# Altium PCB MasterDMX.PcbDoc
Units mm, origin at the board's own origin, x right, y up, seen from the top; angles counter-clockwise.
Board outline 50.04 x 60.07 mm, 2 copper layers (Top Layer, Bottom Layer); 44 components, 34 nets, 198 pads, 26 vias.
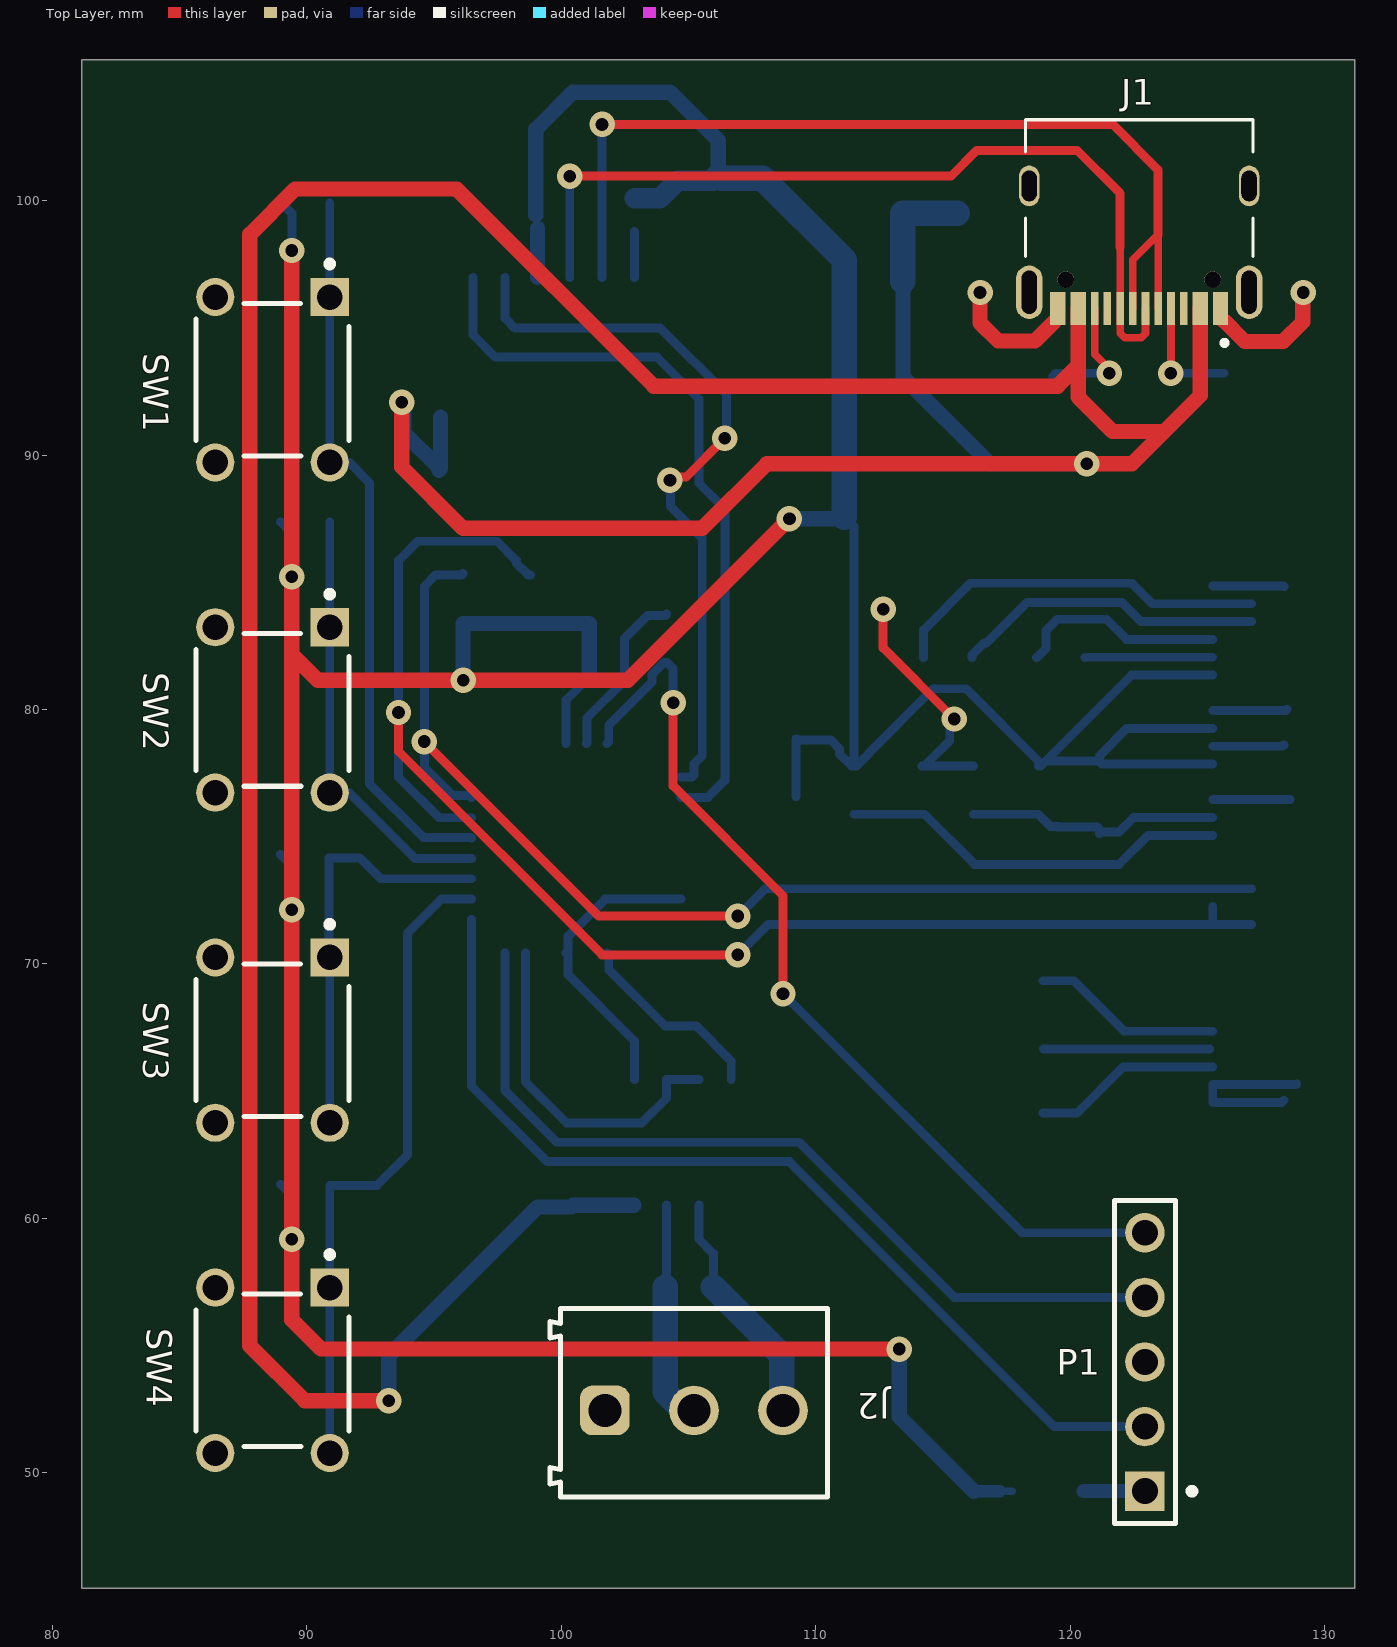
[diagram p0: Top Layer view]
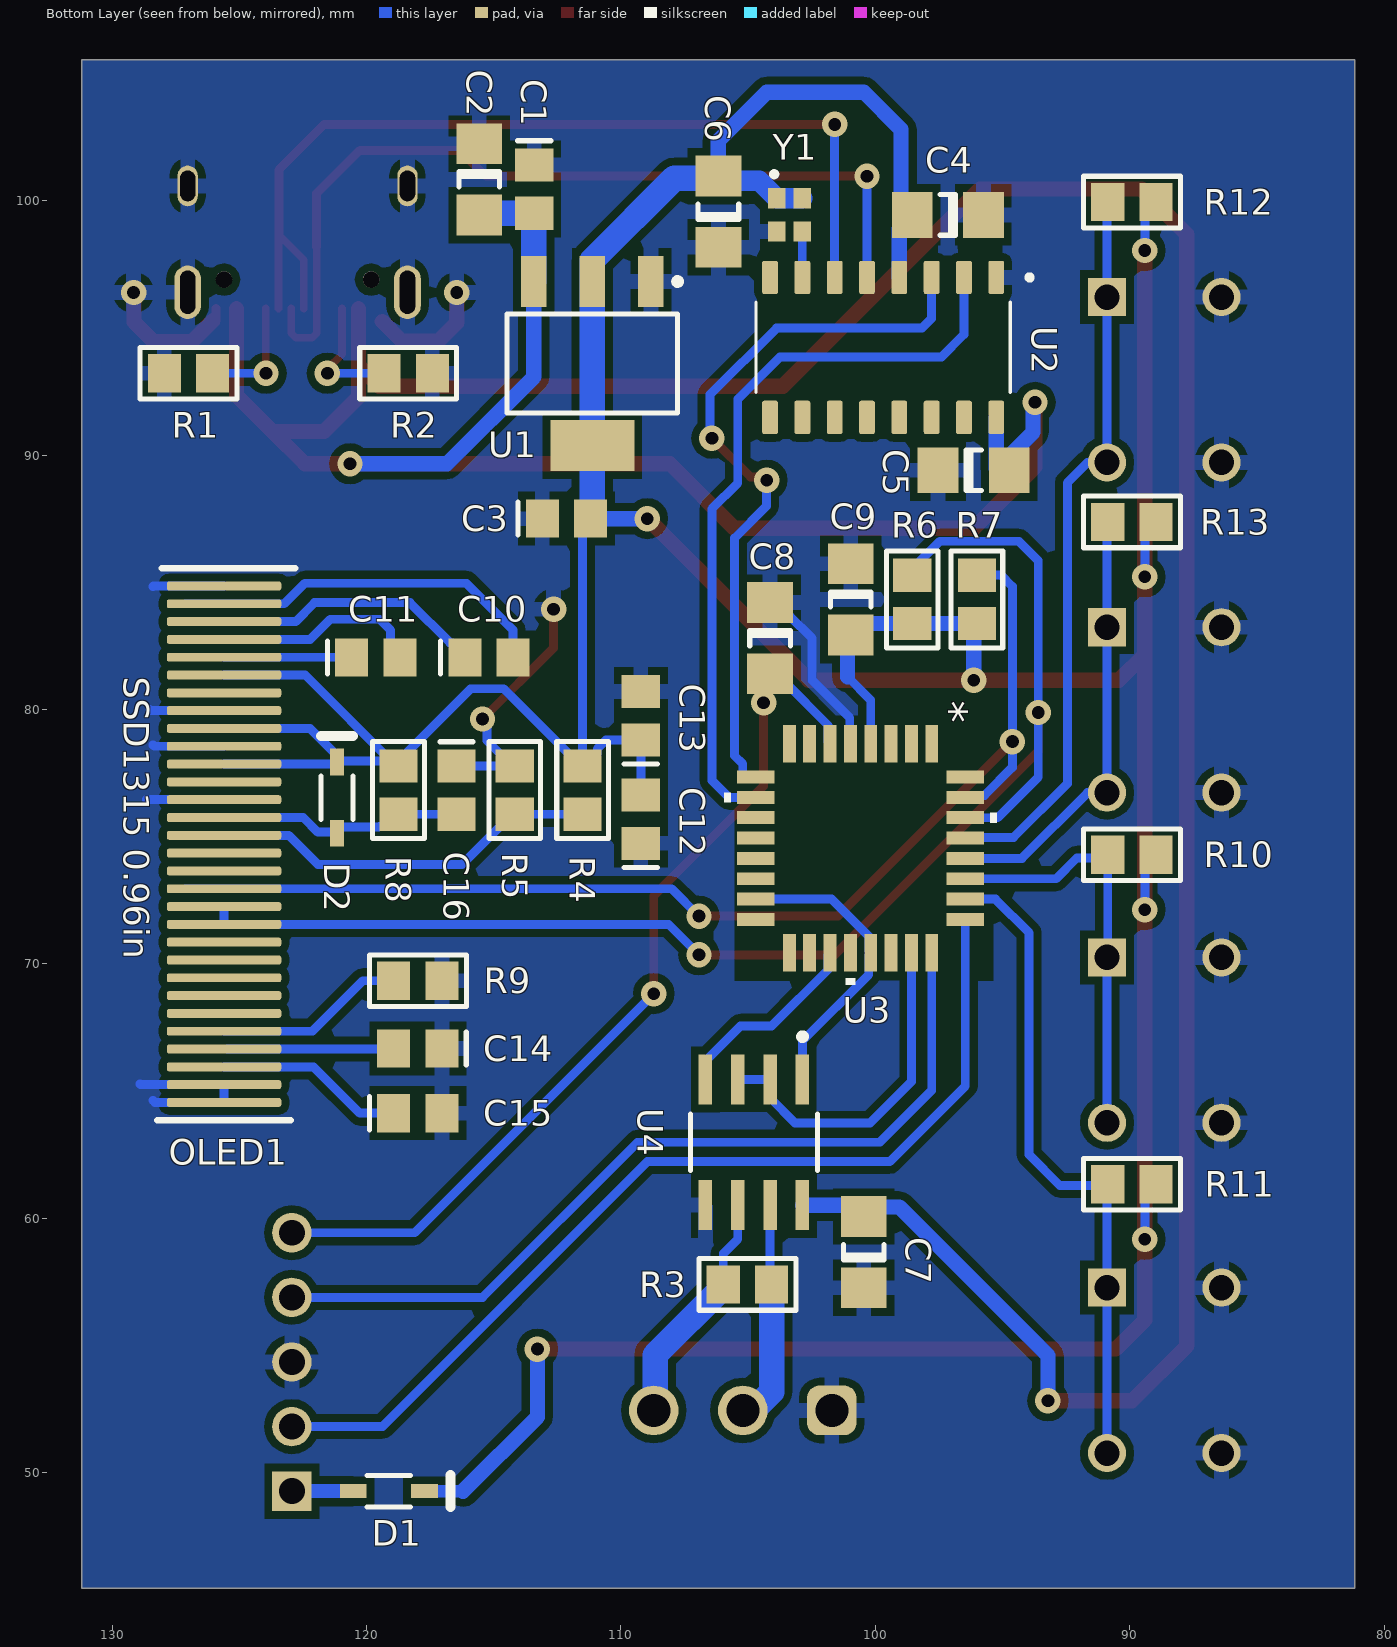
[diagram p1: Bottom Layer view, seen from below]
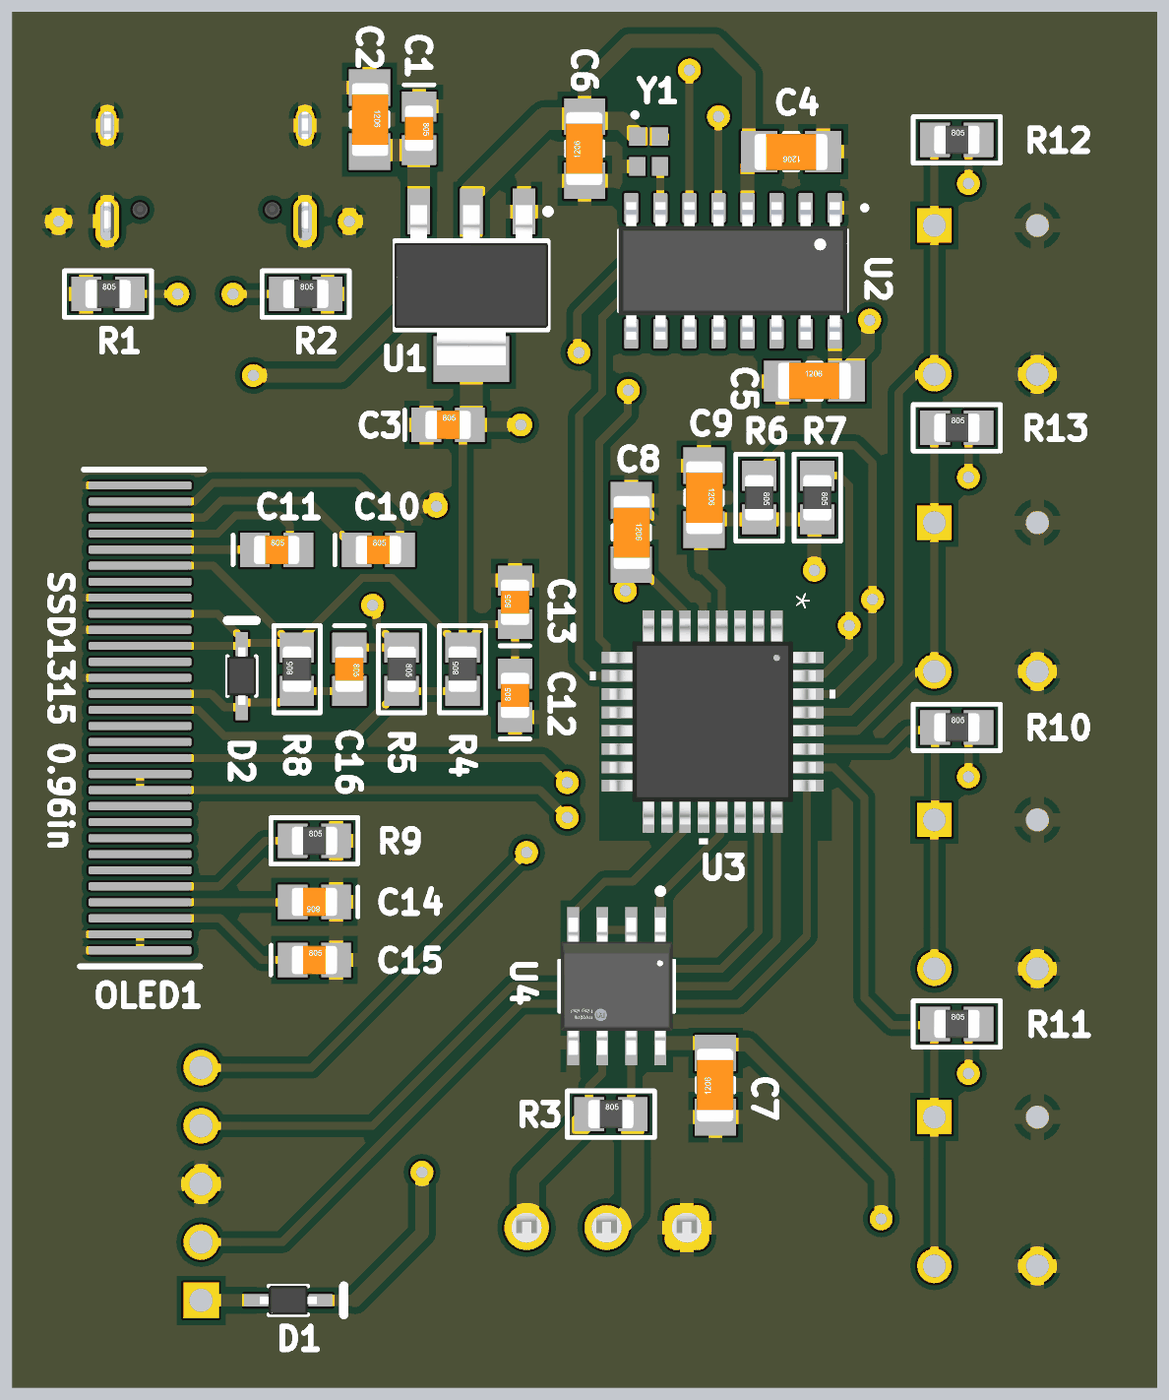
[diagram p2: 3D render of the assembled board from below, using the file's embedded part models]

## Layer stack, top to bottom
Top Solder: solder mask 0.0102, Solder Resist, Dk 3.5
Top Layer: signal copper 0.0356
Dielectric 1: dielectric 0.32, FR-4, Dk 4.8
Bottom Layer: signal copper 0.0356
Bottom Solder: solder mask 0.0102, Solder Resist, Dk 3.5

## Board outline
81.153,45.466 81.153,105.537 131.191,105.537 131.191,45.466

## Design rules (kind name [scope] priority, off if disabled: settings)
Clearance Clearance_U3 [InComponent('U3')] p1: gap=0.1 ignorepadtopadclearanceinfootprint=FALSE
Clearance Clearance_Exclusion [InComponent('J1') OR InComponent('U3') or InNet('5V0') or InNet('D+') or InNet('D-') or InNet('NetJ1_A5') or InNet('NetJ1_B5') vs OnLayer('Top Layer')] p2: gap=0.1 ignorepadtopadclearanceinfootprint=FALSE
Clearance [All] p3: gap=0.3 ignorepadtopadclearanceinfootprint=FALSE
ComponentClearance [All] p1: gap=0.256 collisioncheckmode=3 verticalgap=0.256 showdistances=FALSE donotcheckwithout3dbody=TRUE
HoleSize [All] p1: absolutevalues=TRUE maxlimit=2 minlimit=0.3 maxpercent=80.000 minpercent=20.000
MinimumSolderMaskSliver [All] p1: minsoldermaskwidth=0.09
PolygonConnect [All] p1: connectstyle=Relief reliefconductorwidth=0.6 reliefentries=4 polygonreliefangle="90 Angle" airgapwidth=0.3
RoutingVias [All] p1: holewidth=0.711 width=1.27 viastyle="Through Hole" minholewidth=0.711 minwidth=1.27 maxholewidth=0.711 maxwidth=1.27
SilkToSolderMaskClearance [IsPad] p1: minsilkscreentomaskgap=0.094 clearancetoexposedcopper=TRUE
SolderMaskExpansion [All] p1: expansion=0.102 istentingtop=FALSE
SupplyNets "Schematic Supply Nets" [InNet('GND')] p1: voltage=0.000
Width [All] p1: maxlimit=1 minlimit=0.1 preferedwidth=0.35
26 further rules are at their usual default settings.

## Classes and differential pairs
component class MasterDMX: C1 C2 C3 C4 C5 C6 C7 C8 C9 D1 J1 J2 P1 R1 R2 R3 U1 U2 U3 U4 Y1
component class Designator: 1 C10 C11 C12 C13 C14 C15 C16 D2 OLED1 R4 R5 R6 R7 R8 R9 R10 R11 R12 R13 SW1 SW2 SW3 SW4

## Components (designator, comment, footprint, x,y, rotation, side; value= is the part's Value field where it differs from the comment)
C1 "3.3u" C2012[0805] 113.411,100.457 r270 bottom value=1
C2 "100n" C3216[1206] 115.57,100.838 r270 bottom value=1
C3 "3.3u" C2012[0805] 112.141,87.503 r180 bottom value=1
C4 "100n" C3216[1206] 97.155,99.441 r0 bottom value=1
C5 "100n" C3216[1206] 96.139,89.408 r180 bottom value=1
C6 "100n" C3216[1206] 106.172,99.568 r90 bottom value=1
C7 "100n" C3216[1206] 100.457,58.674 r90 bottom value=1
C8 "100n" C3216[1206] 104.14,82.804 r270 bottom value=1
C9 "100n" C3216[1206] 100.965,84.328 r270 bottom value=1
C10 "1u" C2012[0805] 115.189,82.042 r180 bottom value=1
C11 "1u" C2012[0805] 119.634,82.042 r180 bottom value=1
C12 "1u" C2012[0805] 109.22,75.692 r90 bottom value=1
C13 "1u" C2012[0805] 109.22,79.756 r90 bottom value=1
C14 "2.2u" C2012[0805] 117.983,66.675 r0 bottom value=1
C15 "2.2u" C2012[0805] 117.983,64.135 r180 bottom value=1
C16 "10u" C2012[0805] 116.459,76.835 r270 bottom value=1
D1 "1N4148WS" FAIR-SOD-323_V 119.126,49.276 r180 bottom
D2 "1N4148WS" FAIR-SOD-323_V 121.158,76.536 r90 bottom
J1 "CQ-USB-C16PSMT01" SHENZHEN-CHUANGQIN-TECHNOLOGY_CQ-USB-C16PSMT01 122.713,95.761 r180 top
J2 "DMX_Connector" 691214110003 105.212,52.751 r0 top
OLED1 "X0096-2864KS WPG02-H30" SSD1315_0.96in_30P 125.603,84.857 r270 bottom
P1 "Programming Interface" FCI-77311-5_V 122.936,54.356 r90 top
R1 "5.6k" R2012[0805] 127,93.218 r180 bottom value=0
R2 "5.6k" R2012[0805] 118.364,93.218 r180 bottom value=0
R3 "120" R2012[0805] 105.029,57.404 r180 bottom value=0
R4 "0" R2012[0805] 111.506,76.835 r90 bottom
R5 "0" R2012[0805] 114.173,76.835 r270 bottom
R6 "4.7k" R2012[0805] 98.552,84.328 r270 bottom value=0
R7 "4.7k" R2012[0805] 96.012,84.328 r270 bottom value=0
R8 "4.7k" R2012[0805] 118.745,76.835 r90 bottom value=0
R9 "240k" R2012[0805] 117.983,69.342 r180 bottom value=0
R10 "12k" R2012[0805] 89.916,74.295 r180 bottom value=0
R11 "12k" R2012[0805] 89.916,61.341 r180 bottom value=0
R12 "12k" R2012[0805] 89.916,99.949 r180 bottom value=0
R13 "12k" R2012[0805] 89.916,87.376 r180 bottom value=0
SW1 "B3F-1000" OMRON-B3F-1000-4_V 88.646,92.964 r270 top
SW2 "B3F-1000" OMRON-B3F-1000-4_V 88.646,79.985 r270 top
SW3 "B3F-1000" OMRON-B3F-1000-4_V 88.646,67.006 r270 top
SW4 "B3F-1000" OMRON-B3F-1000-4_V 88.646,54.027 r270 top
U1 "LD1117S33TR" STM-SOT-223_M 111.125,93.599 r270 bottom
U2 "CH340G" SOIC127P600X180-16N 99.695,94.234 r270 bottom
U3 "STM32C031K6T6" LQFP32_7X7_STM 100.584,74.549 r270 bottom
U4 "MAX485ESA+T" FP-S8-2-MFG 104.775,62.992 r270 bottom
Y1 "YSO110TR" OSC_ECS-TXO-2016-33-120-TR 103.378,99.441 r270 bottom

## Footprints (in the part's own frame and the unit in brackets; to place one, negate y for a bottom-side part, rotate by r counter-clockwise, add the part's x,y. Pads: shape width x height; smd on the part's side, far side on the other; paste and mask are expansions set on the pad)
691214110003 [mm] "3.50 mm Horizontal Entry Modular, 3p"
  rrect50% 1.95x1.95 hole 1.3: 1(-3.5,-0.3)
  round 1.95 hole 1.3: 2(0,-0.3) 3(3.5,-0.3)
  silkscreen extent -5.65,-3.7 5.25,3.7, body extent -5.7,-3.7 5.25,3.7, height 8.55
C2012[0805] [mm] "Chip Capacitor; Body 2.0 x 1.2 mm (LxW typ)"
  rect 1.3x1.5 smd: 1(-0.95,0) 2(0.95,0)
  silkscreen extent -1.9,-0.65 -1.9,0.65, body extent -1,-0.62 1,0.63, height 0.8
C3216[1206] [mm] "Chip Capacitor; Body 3.2 x 1.6 mm (LxW typ)"
  rect 1.6x1.8 smd: 1(-1.4,0) 2(1.4,0)
  silkscreen extent -0.3,-0.8 0.3,0.8, body extent -1.6,-0.78 1.6,0.82, height 1.02
FAIR-SOD-323_V [mm] "SODFL, 2-Leads, Body 1.25x1.7mm"
  rect 1.05x0.55 smd: 1(-1.4,0) 2(1.4,0)
  silkscreen extent -0.85,-0.63 2.43,0.63, body extent -1.25,-0.63 1.25,0.63, height 1
FCI-77311-5_V [mm] "THD, 5-Leads, Body 12.7x2.4mm, Pitch 2.54mm"
  rect 1.55x1.55 hole 1.02: 1(-5.08,0)
  round 1.55 hole 1.02: 2(-2.54,0) 3(0,0) 4(2.54,0) 5(5.08,0)
  silkscreen extent -6.35,-1.97 6.35,1.2, body extent -6.35,-1.2 6.35,1.2, height 16.24
FP-S8-2-MFG [mm]
  rect 1.98x0.53 smd paste+0 mask+0: 1(-2.465,1.905) 2(-2.465,0.635) 3(-2.465,-0.635) 4(-2.465,-1.905) 5(2.465,-1.905) 6(2.465,-0.635) 7(2.465,0.635) 8(2.465,1.905)
  silkscreen extent -4.27,-2.5 1.1,2.5, body extent -3,-2.45 3,2.45, height 1.75
LQFP32_7X7_STM [mil]
  rect 58x20 smd paste+0 mask+0: 1(-162,110.24) 2(-162,78.74) 3(-162,47.24) 4(-162,15.75) 5(-162,-15.75) 6(-162,-47.24) 7(-162,-78.74) 8(-162,-110.24) 17(162,-110.24) 18(162,-78.74) 19(162,-47.24) 20(162,-15.75) 21(162,15.75) 22(162,47.24) 23(162,78.74) 24(162,110.24)
  rect 20x58 smd paste+0 mask+0: 9(-110.24,-162) 10(-78.74,-162) 11(-47.24,-162) 12(-15.75,-162) 13(15.75,-162) 14(47.24,-162) 15(78.74,-162) 16(110.24,-162) 25(110.24,162) 26(78.74,162) 27(47.24,162) 28(15.75,162) 29(-15.75,162) 30(-47.24,162) 31(-78.74,162) 32(-110.24,162)
  silkscreen extent -86,-211 211,211, body extent -177,-177 177,177, height 63
OMRON-B3F-1000-4_V [mm] "TH, 4-Leads, Body 6x6mm"
  rect 1.5x1.5 hole 1 paste-2539.97: 1(-3.25,2.25)
  round 1.5 hole 1 paste-2539.97: 2(3.25,2.25) 4(3.25,-2.25)
  round 1.5 hole 1 paste-2539.97 mask+0.102: 3(-3.25,-2.25)
  silkscreen extent -4.67,-3 3,3, body extent -3.4,-3 3.4,3, height 4.5
OSC_ECS-TXO-2016-33-120-TR [mm]
  rect 0.8x0.7 smd: 1(-0.65,-0.5) 2(0.65,-0.5) 3(0.65,0.5) 4(-0.65,0.5)
  silkscreen extent -1.7,-0.7 -1.5,-0.5
R2012[0805] [mm] "Chip Resistor; Body 2.0 x 1.3 mm (LxW typ)"
  rect 1.3x1.5 smd: 1(-0.95,0) 2(0.95,0)
  silkscreen extent -1.91,-1.02 1.91,1.02, body extent -1,-0.62 1,0.63, height 0.8
SHENZHEN-CHUANGQIN-TECHNOLOGY_CQ-USB-C16PSMT01 [mm]
  rect 0.6x1.3 smd: A1_B12(-3.2,0) A4_B9(-2.4,0) B1_A12(3.2,0) B4_A9(2.4,0)
  rect 0.3x1.3 smd: A5(-1.25,0) A6(-0.25,0) A7(0.25,0) A8(1.25,0) B5(1.75,0) B6(0.75,0) B7(-0.75,0) B8(-1.75,0)
  oval 1.05x2.1 hole 0.6 slot 1.7 at 90 deg: S1(-4.32,-0.64) S2(4.32,-0.64)
  oval 0.8x1.6 hole 0.6 slot 1.2 at 90 deg: S3(-4.32,-4.82) S4(4.32,-4.82)
  round 0.65 hole 0.65 unplated: ""(-2.89,-1.14) ""(2.89,-1.14)
  silkscreen extent -4.47,-7.42 4.47,1.45, body extent -4.47,-7.46 4.47,0.35, height 3.26
SOIC127P600X180-16N [mm]
  rrect25% 1.31x0.62 smd: 1(-2.75,4.445) 2(-2.75,3.175) 3(-2.75,1.905) 4(-2.75,0.635) 5(-2.75,-0.635) 6(-2.75,-1.905) 7(-2.75,-3.175) 8(-2.75,-4.445) 9(2.75,-4.445) 10(2.75,-3.175) 11(2.75,-1.905) 12(2.75,-0.635) 13(2.75,0.635) 14(2.75,1.905) 15(2.75,3.175) 16(2.75,4.445)
  silkscreen extent -2.85,-5 1.78,5.85, body extent -3,-5 3,5, height 1.8
SSD1315_0.96in_30P [mm]
  rrect50% 0.35x4.5 smd: 1(0,0) 2(0.7,0) 3(1.4,0) 4(2.1,0) 5(2.8,0) 6(3.5,0) 7(4.2,0) 8(4.9,0) 9(5.6,0) 10(6.3,0) 11(7,0) 12(7.7,0) 13(8.4,0) 14(9.1,0) 15(9.8,0) 16(10.5,0) 17(11.2,0) 18(11.9,0) 19(12.6,0) 20(13.3,0) 21(14,0) 22(14.7,0) 23(15.4,0) 24(16.1,0) 25(16.8,0) 26(17.5,0) 27(18.2,0) 28(18.9,0) 29(19.6,0) 30(20.3,0)
  silkscreen extent -0.7,-2.63 21,2.8
STM-SOT-223_M [mm] "SOT223, 4-Leads, Body 6.7x3.7mm, Pitch 2.3mm, IPC Low Density"
  rect 2x1 smd: 1(-3.225,2.3) 2(-3.225,0) 3(-3.225,-2.3)
  rect 2x3.3 smd: 4(3.225,0)
  silkscreen extent -3.35,-3.35 1.95,3.47, body extent -3.5,-3.35 3.5,3.35, height 1.8

## Part data
C1 C2 C3 C4 C5 C6 C7 C8 C9 C10 C11 C12 C13 C14 C15 C16: library part C, "Capacitor"
D1 D2: library part CMP-004-00001-2, "Small Signal Diode, 75 V, 0.15 A, -55 to 150 degC, 2-Pin SOD-323, RoHS, Tape and Reel", Capacitance=-323f, Case/Package=SOD-323, Forward Current=150mA, Forward Voltage=1V, Manufacturer=Fairchild, Max Operating Temperature=150°C, Min Operating Temperature=-55°C, Package Description="2-Pin Small Outline Diode Flat Lead, Body 1.7 x 1.25 mm", Package Quantity=3000, Peak Reverse Current=5uA, Datasheet URL=https://www.fairchildsemi.com/datasheets/1N/1N4148WS.pdf, Datasheet Version="Rev. 1.2, 03/2015", Manufacturer URL=https://www.fairchildsemi.com/, Mounting Technology=SM, Package Reference=SOD-323, Packaging=TapeandReel, Pins=2, Recovery Time=4ns, RoHS Compliant=True
J1: "C Type USB Type-C Female Plug 16 Pin Connector Power Charger Jack Port", Package=Package, Availability=Unavailable, Check_prices=https://www.snapeda.com/parts/CQ-USB-C16PSMT01/Shenzen%20Chuangqin%20Technology/view-part/5798994/?ref=eda, MF="Shenzen Chuangqin Technology", MP=CQ-USB-C16PSMT01, Price=None, SnapEDA_Link=https://www.snapeda.com/parts/CQ-USB-C16PSMT01/Shenzen%20Chuangqin%20Technology/view-part/5798994/?ref=snap
J2: library part CMP-1502-02466-2, Color="Blue, Green", Current=10A, Max Operating Temperature=105°C, Min Operating Temperature=-40°C, Voltage=300V, Contact Material=Brass, Contact Plating="Brass, Tin", Current Rating=10A, Height=12.2mm, Housing Material=Nylon, Lead Pitch=3.5mm, Length=7.4mm, Mount="Through Hole", NexarPartId=18818289, Number of Contacts=3, Number of Levels=1, Number of Pins=3, Number of Positions Per Level=3, Packaging=Box, Pitch=3.5052mm, Plating="Brass, Steel", REACH SVHC=Unknown, RoHS=Compliant, Stripping Length=-6mm, Termination=Screw, Voltage Rating=300V, Width=10.9mm, Wire Gauge (Max)=24AWG, Wire Gauge (Min)=16AWG, Wire/Cable Gauge=24AWG
OLED1: library part VG-2864KSWEG01-
P1: library part CMP-002-00021-2, "Male Header, Pitch 2.54 mm, 1 x 5 Position, Height 16.24 mm, Tail Length 3.05 mm, -65 to 125 degC, RoHS, Tape and Reel", Case/Package=77311-5, Manufacturer="FCI Electronics", Package Description="Male Header, Pitch 2.54 mm, 1 x 5 Position, Height 16.24 mm, Tail Length 3.05 mm", Connector Type=Header, Datasheet URL=http://portal.fciconnect.com/Comergent//fci/drawing/77311.pdf, Datasheet Version="Rev. CK, 07/2016", Gender=Male, Manufacturer URL=http://portal.fciconnect.com/, Mounting Technology=TH, Package Reference=77311-5, RoHS Compliant=Unknown
R1 R2 R3 R4 R5 R6 R7 R8 R9 R10 R11 R12 R13: library part R, "Resistor"
SW1 SW2 SW3 SW4: library part CMP-011-00004-2, "Tactile Switch, SPST-NO, 0.05 A, 24 V, -25 to 70 degC, 4-Pin THD, RoHS, Bulk", Contact Current Rating=50mA, Manufacturer="Omron Electronic Components", Max Contact Resistance=100mohm, Max Operating Temperature=70°C, Max Voltage Rating (DC)=24V, Min Operating Temperature=-25°C, Operating Force=100gf, Package Description="4-Pin Through Hole Device, Body 6 x 6 mm", Package Quantity=1500, Resistance=0.1Ohm, Case/Package=B3F-1000, Contact Material=Gold, Contact Plating=Gold, Current Rating=50mA, Datasheet URL=http://www.omron.com/ecb/products/pdf/en-b3f.pdf, Datasheet Version=Jan-15, Manufacturer URL=http://www.omron.com/, Max Current Rating=50mA, Mounting Technology=TH, Package Reference=B3F-1000, Packaging=Bulk, Pins=4, RoHS Compliant=True, Throw Configuration=SPST, Voltage Rating=24V, Voltage Rating (DC)=24V
U1: library part CMP-019-00019-3, "Low Drop Positive Voltage Regulator, 800 mA, Fixed 3.3 V Output, 0 to 125 degC, 3-Pin TO-220, RoHS, Tape and Reel", Case/Package=TO-261-4, Dropout Voltage=1.1V, Manufacturer=STMicroelectronics, Max Input Voltage=15V, Max Operating Temperature=125°C, Max Ouput Current=1.3A, Min Input Voltage=4.75V, Min Operating Temperature=0°C, Nominal Output Voltage=3.3V, Output Current=950mA, Package Description="4-Pin Small Outline Transistor, Body 6.5 x 3.5 mm, Pitch 2.3 mm", Package Quantity=2500, Package Reference=SOT-223, Power=12W, Datasheet URL=http://www.farnell.com/datasheets/1776449.pdf, Datasheet Version="Rev. 33, 11/2013", Manufacturer URL=http://www.st.com/, Max Supply Voltage=15V, Min Supply Voltage=4.75V, Mounting Technology=SM, Output Voltage=3.3V, Outputs=1, Packaging=TapeandReel, Pins=3, RoHS Compliant=True
U2: "USB Interface Integrated Circuit", Package=None, Availability="Not in stock", Check_prices=https://www.snapeda.com/parts/Ch340G/WCH/view-part/?ref=eda, MF=WCH, MP=Ch340G, Price=None, SnapEDA_Link=https://www.snapeda.com/parts/Ch340G/WCH/view-part/?ref=snap
U3: "No Description Available", Mfr_Name=STMicroelectronics, RefDes=RefDes, Type=Type
U4: library part CMP-015-00008-1, "Line Transceiver, 1 Func, 1 Driver, 1 Rcvr, CMOS, PDSO8", Max Operating Temperature=85°C, Max Supply Voltage=5.25V, Min Operating Temperature=-40°C, Min Supply Voltage=4.75V, RoHS Compliant=Yes
Y1: library part CMP-003-000000-1, Package=None, Availability=Unavailable, Component Type=Standard, Design Item ID=ECS-TXO-2016-33-120-TR, MP=ECS-TXO-2016-33-120-TR, Pin Count=4, Price=None, Source=ECS-TXO-2016-33-120-TR.SchLib

## Via types
v1: diameter 1, hole 0.5, Top Layer to Bottom Layer, 26 vias

## Nets (pads, with @x,y where several pads share a name; then routed paths per layer and width w, separated by ;. In a path a pad name is that pad's centre, name@x,y a point inside that pad or via, vN(x,y) a via of type N, cw(c..) or ccw(c..) an arc to the next point about the centre after c; other vN are vias at no path point)
3V3: C3.2 C4.2 C6.2 C9.2 C12.2 C13.1 D1.2 D2.2 OLED1.6 OLED1.9 OLED1.11 R4.2 R6.2 R7.2 R8.2 R10.2 R11.2 R12.2 R13.2 U1.2 U1.4 U2.4 U3.4 Y1.1 Y1.4 | length 200.8
  Top Layer w0.6: v1(89.408,98.044) v1(89.408,85.217) 89.408,82.169 ; v1(108.966,87.503) 102.616,81.153 v1(96.139,81.153) 90.424,81.153 89.408,82.169 ; v1(113.284,54.864) 90.551,54.864 89.408,56.007 v1(89.408,59.182) v1(89.408,72.136) 89.408,82.169
  Bottom Layer w0.3: D1.2@117.221,49.276 D1.2
  Bottom Layer w0.35: R11.2 89.408,60.899 v1(89.408,59.182) ; R10.2 89.408,73.853 v1(89.408,72.136) ; R13.2 89.408,86.934 v1(89.408,85.217) ; R12.2 89.408,99.507 v1(89.408,98.044) ; C4.2@99.06,98.899 C4.2@99.16,98.999 ; U3.4 100.184,80.372 101.092,81.28 ; Y1.4@102.878,100.041 Y1.4 ; C12.2@109.22,76.588 C12.2 C13.1 ; C13.1@109.22,78.848 C13.1 ; C3.2@111.064,87.503 C3.2@111.125,87.564 ; C3.2 111.506,87.188 R4.2 ; R8.2 R8.2@118.845,77.785 ; R8.2@119.068,77.981 D2.2@121.158,77.981 ; D2.2 D2.2@121.158,77.957 ; OLED1.11 121.258,77.857 D2.2@121.158,77.957 ; OLED1.9 122.229,79.257 121.158,78.186 D2.2@121.158,77.981 ; OLED1.6 122.417,81.357 118.893,77.833 115.909,80.817 114.608,80.817 112.081,78.29 112.081,78.26 111.606,77.785 R4.2 ; C13.1 110.585,78.806 110.931,78.46 110.931,78.26 111.406,77.785 R4.2 ; D2.2@121.158,77.957 D2.2@121.158,77.981
  Bottom Layer w0.5: 116.205,49.276 D1.2@117.221,49.276
  Bottom Layer w0.6: v1(96.139,81.153) 96.139,83.378 R6.2 101.092,83.378 101.092,81.28 ; C4.2@98.994,99.441 98.994,102.804 100.457,104.267 104.267,104.267 106.172,102.362 C6.2@106.172,101.346 ; U2.4 C4.2@99.06,98.899 ; v1(108.966,87.503) C3.2@111.064,87.503 ; v1(113.284,54.864) 113.284,52.197 116.205,49.276
  Bottom Layer w0.8: Y1.4 Y1.1 104.565,100.778 105.982,100.778 C6.2
  Bottom Layer w1: C6.2 106.259,100.881 107.907,100.881 111.125,97.663 U1.2 U1.4 C3.2@111.125,87.564
5V0: C1.2 C2.2 C5.2 C7.2 J1.A4_B9 J1.B4_A9 U1.3 U2.16 U4.8 | length 171.2
  Top Layer w0.6: v1(93.218,52.832) 89.916,52.832 87.757,54.991 87.757,98.679 89.535,100.457 95.885,100.457 103.632,92.71 119.507,92.71 120.313,93.516 ; v1(93.726,92.075) 93.726,89.535 96.139,87.122 105.537,87.122 108.077,89.662 v1(120.65,89.662) 122.428,89.662 123.698,90.932 ; J1.B4_A9 120.313,93.516 ; J1.A4_B9 125.113,92.347 123.698,90.932 ; 120.313,93.516 120.313,92.285 121.666,90.932 123.698,90.932
  Bottom Layer w0.35: C7.2@100.396,60.452 C7.2@100.457,60.513 ; U4.8@102.856,60.513 U4.8 ; C1.2 C1.2@113.425,99.493
  Bottom Layer w0.6: v1(93.218,52.832) 93.218,54.61 99.06,60.452 C7.2@100.396,60.452 ; v1(93.726,92.075) 93.803,91.998 93.803,90.894 95.189,89.508 C5.2@95.189,89.408 ; C5.2@95.25,89.469 U2.16 ; C7.2@100.457,60.513 U4.8@102.856,60.513 ; U1.3 113.425,93.077 116.84,89.662 v1(120.65,89.662)
  Bottom Layer w1: C1.2 C2.2@115.57,99.507 ; U1.3 C1.2@113.425,99.493
Back_button: R12.1 SW1.1 SW1.2 U3.29 | length 28.8
  Bottom Layer w0.35: R12.1@90.896,99.913 SW1.1 SW1.2 91.658,89.714 92.456,88.916 92.456,77.089 94.572,74.973 96.445,74.973 U3.29
D+: J1.A6 J1.B6 U2.5 | length 34.3
  Top Layer w0.3: 121.963,98.171 J1.B6 121.963,94.791 122.139,94.615 122.787,94.615 122.963,94.791 J1.A6
  Top Layer w0.35: v1(100.33,100.965) 115.316,100.965 116.332,101.981 120.269,101.981 121.963,100.287 121.963,98.171
  Bottom Layer w0.35: U2.5 v1(100.33,100.965)
D-: J1.A7 J1.B7 U2.6 | length 37.4
  Top Layer w0.3: J1.A7 122.463,97.679 123.444,98.66 ; J1.B7 123.463,98.679
  Top Layer w0.35: v1(101.6,102.997) 121.666,102.997 123.444,101.219 123.444,98.66
  Bottom Layer w0.35: U2.6 v1(101.6,102.997)
D/C#: OLED1.15 R4.1 R5.2 | length 15.4
  Bottom Layer w0.35: R4.1 R5.2 114.273,75.885 116.244,73.914 121.92,73.914 123.063,75.057 OLED1.15
Display_SCL: OLED1.19 OLED1.20 R6.1 U3.30 | length 57.7
  Top Layer w0.35: v1(93.599,79.883) 93.599,78.359 101.6,70.358 v1(106.934,70.358)
  Bottom Layer w0.35: U3.30 95.193,75.749 93.599,77.343 v1(93.599,79.883) 93.599,85.852 94.361,86.614 97.47,86.614 98.231,85.853 98.231,85.753 98.691,85.293 R6.1@98.791,85.293 ; v1(106.934,70.358) 108.133,71.557 OLED1.20 ; OLED1.19 OLED1.20 ; OLED1.20@127.127,71.557 OLED1.20
Display_SDA: OLED1.18 R7.1 U3.31 | length 47
  Top Layer w0.35: v1(94.615,78.74) 101.473,71.882 v1(106.934,71.882)
  Bottom Layer w0.35: R7.1@96.139,85.344 96.085,85.29 95.069,85.29 94.615,84.836 v1(94.615,78.74) 94.615,77.724 95.711,76.628 96.39,76.628 U3.31 ; v1(106.934,71.882) 108.009,72.957 OLED1.18 OLED1.18@127.127,72.957
DMX_A: J2.3 R3.1 U4.6 | length 9.8
  Bottom Layer w0.35: U4.6 105.41,59.182 105.979,58.613 R3.1 R3.1@105.979,57.304
  Bottom Layer w1: R3.1@105.979,57.304 108.656,54.627 J2.3@108.656,52.116
DMX_B: J2.2 R3.2 U4.7 | length 8.8
  Bottom Layer w0.35: R3.2 104.14,57.465 U4.7
  Bottom Layer w1: R3.2@104.079,57.304 104.079,53.177 105.14,52.116 J2.2@105.156,52.116
DMX_DE: U3.23 U4.2 U4.3 | length 13.7
  Bottom Layer w0.35: U3.23 98.584,65.373 100.203,63.754 103.162,63.754 104.14,64.732 U4.2 U4.3
DMX_RX: U3.15 U3.21 U4.1 | length 11.8
  Bottom Layer w0.35: U4.1 102.87,66.182 102.87,66.972 100.263,69.579 100.263,70.355 U3.21 100.263,70.513 100.263,71.093 101.719,72.549 U3.15
DMX_TX: U3.19 U4.4 | length 7.7
  Bottom Layer w0.35: U3.19 101.863,70.355 101.863,69.776 104.075,67.564 105.298,67.564 106.68,66.182 U4.4
Down_button: R13.1 SW2.1 SW2.2 U3.28 | length 17.3
  Bottom Layer w0.35: R13.1@90.896,87.376 SW2.1 SW2.2 91.658,76.735 94.244,74.149 U3.28
Enter_button: R11.1 SW4.1 SW4.2 U3.26 | length 25.9
  Bottom Layer w0.35: SW4.2 SW4.1 90.896,61.292 92.749,61.292 93.957,62.5 93.957,71.224 95.282,72.549 U3.26
GND: C1.1 C2.1 C3.1 C4.1 C5.1 C6.1 C7.1 C8.1 C9.1 C12.1 C13.2 C14.1 C15.2 C16.1 J1.A1_B12 J1.B1_A12 J1.S1 J1.S2 J1.S3 J1.S4 J2.1 OLED1.1 OLED1.8 OLED1.10 OLED1.13 OLED1.29 OLED1.30 P1.3 R1.1 R2.2 R5.1 R9.2 SW1.3 SW1.4 SW2.3 SW2.4 SW3.3 SW3.4 SW4.3 SW4.4 U1.1 U2.1 U3.5 U4.5 Y1.2 | length 45.3
  Top Layer w0.35: v1(112.649,83.947) 112.649,82.423 v1(115.443,79.629) ; J1.A1_B12 125.913,95.411 J1.A1_B12@126.038,95.286 ; v1@129.142,96.376 v1(129.159,96.393)
  Top Layer w0.6: v1(116.459,96.393) 116.459,95.201 117.172,94.488 118.618,94.488 J1.B1_A12@119.38,95.25 ; J1.A1_B12@126.038,95.286 126.86,94.464 128.373,94.464 129.142,95.233 v1@129.142,96.376
  Bottom Layer w0.35: U3.5 101.008,78.688 101.008,79.672 102.489,81.153 102.489,82.804 103.378,83.693 104.079,83.693 C8.1@104.14,83.754 ; R5.1 R5.1@114.273,77.785 ; v1(115.443,79.629) 115.267,79.453 115.267,78.779 R5.1@114.273,77.785 ; C16.1@116.205,77.785 R5.1@114.273,77.785 ; OLED1.13 128.648,76.457 128.651,76.454 ; OLED1.10 128.341,78.557 128.397,78.613 ; OLED1.8 128.471,79.957 128.524,80.01 ; OLED1.1 128.376,84.857 128.397,84.836 ; 128.397,64.643 128.311,64.557 OLED1.30 OLED1.29 128.884,65.257 128.905,65.278
NetC10_1: C10.1 OLED1.3 | length 12.2
  Bottom Layer w0.35: C10.1 116.139,82.142 116.614,82.617 116.714,82.617 118.298,84.201 122.047,84.201 122.791,83.457 OLED1.3 OLED1.3@127.127,83.457
NetC10_2: C10.2 OLED1.2 | length 15.1
  Bottom Layer w0.35: C10.2 114.239,83.124 116.078,84.963 122.428,84.963 123.234,84.157 OLED1.2 OLED1.2@127.127,84.157
NetC11_1: C11.1 OLED1.5 | length 5
  Bottom Layer w0.35: C11.1 120.599,82.057 OLED1.5
NetC11_2: C11.2 OLED1.4 | length 8.3
  Bottom Layer w0.35: C11.2 119.053,82.411 119.053,83.112 119.492,83.551 121.427,83.551 122.221,82.757 OLED1.4
NetC14_2: C14.2 OLED1.27 | length 6.6
  Bottom Layer w0.254: C14.2 C14.2@118.951,66.657
  Bottom Layer w0.35: C14.2@118.951,66.657 OLED1.27@125.476,66.657
NetC15_1: C15.1 OLED1.28 | length 7.4
  Bottom Layer w0.35: C15.1 120.269,64.135 122.091,65.957 OLED1.28
NetD1_1: D1.1 P1.1 | length 2.4
  Bottom Layer w0.55: D1.1 P1.1
NetJ1_A5: J1.A5 R1.2 | length 4.6
  Top Layer w0.3: v1@123.963,93.218 J1.A5
  Bottom Layer w0.35: v1(123.952,93.218) R1.2
NetJ1_B5: J1.B5 R2.1 | length 5.1
  Top Layer w0.3: J1.B5 120.963,93.97 v1@121.539,93.394
  Top Layer w0.35: v1(121.539,93.218) v1@121.539,93.394
  Bottom Layer w0.35: R2.1@119.314,93.091 119.441,93.218 v1(121.539,93.218)
NetOLED1_26: OLED1.26 R9.1 | length 7.5
  Bottom Layer w0.35: R9.1 120.142,69.342 122.127,67.357 OLED1.26
NetU2_7: U2.7 Y1.3 | length 1.8
  Bottom Layer w0.35: U2.7 102.874,96.988 102.874,98.787 Y1.3
NRST: C8.2 P1.5 U3.6 | length 37.3
  Top Layer w0.35: v1(104.394,80.264) 104.394,77.001 108.712,72.683 v1(108.712,68.834)
  Bottom Layer w0.35: U3.6 101.863,78.743 101.863,79.384 103.565,81.086 103.565,81.379 104.04,81.854 104.14,81.854 104.394,81.6 v1(104.394,80.264) ; v1(108.712,68.834) 118.11,59.436 P1.5
RES#: C16.2 D2.1 OLED1.14 R8.1 | length 10
  Bottom Layer w0.35: C16.2@116.205,75.885 C16.2 R8.1 119.22,75.41 119.501,75.41 119.525,75.386 121.058,75.386 121.158,75.286 D2.1@121.158,75.181 ; D2.1 D2.1@121.158,75.181 ; OLED1.14 122.493,75.757 121.917,75.181 D2.1@121.158,75.181
SWCLK: P1.2 U3.25 | length 38.6
  Bottom Layer w0.35: U3.25 96.469,65.202 99.441,62.23 108.966,62.23 119.38,51.816 P1.2
SWDIO: P1.4 U3.24 | length 33.9
  Bottom Layer w0.35: U3.24 97.784,65.03 99.822,62.992 109.347,62.992 115.443,56.896 P1.4
Up_button: R10.1 SW3.1 SW3.2 U3.27 | length 16.4
  Bottom Layer w0.35: SW3.2 SW3.1 90.866,70.286 90.866,74.168 92.075,74.168 92.894,73.349 U3.27
USB_RX: U2.2 U3.10 | length 29.6
  Bottom Layer w0.35: U2.2 96.52,94.742 97.409,93.853 103.759,93.853 105.41,92.202 105.41,88.9 106.426,87.884 106.426,77.216 105.759,76.549 U3.10
USB_TX: U2.3 U3.9 | length 28.9
  Top Layer w0.35: v1(104.267,89.016) 104.391,89.14 104.901,89.14 v1(106.426,90.665)
  Bottom Layer w0.35: U2.3 97.79,95.377 98.171,94.996 103.886,94.996 106.496,92.386 106.496,90.735 v1(106.426,90.665) ; v1(104.267,89.016) 104.287,88.996 104.287,87.991 105.537,86.741 105.537,78.187 105.215,77.866 105.215,77.428 105.136,77.349 U3.9
pads on no net: J1. J1.A8 J1.B8 OLED1.7 OLED1.12 OLED1.16 OLED1.17 OLED1.21 OLED1.22 OLED1.23 OLED1.24 OLED1.25 U2.8 U2.9 U2.10 U2.11 U2.12 U2.13 U2.14 U2.15 U3.1 U3.2 U3.3 U3.7 U3.8 U3.11 U3.12 U3.13 U3.14 U3.16 U3.17 U3.18 U3.20 U3.22 U3.32

## Polygon pours and split planes (outlines as drawn)
GND on Bottom Layer "GND_L02_P000" (solid, pour order 0): 81.153,105.537 131.191,105.537 131.191,45.466 81.153,45.466

## Other copper
Bottom Layer:
  pour cut-out: 123.317,85.09 127.889,85.09 127.889,64.262 123.317,64.262
  pour cut-out: 105.537,79.756 105.537,69.342 95.377,69.342 95.377,79.756
  pour cut-out: 94.745,96.134 104.645,96.134 104.648,96.131 104.648,92.329 94.756,92.329 94.745,92.34

## Silkscreen, mask and mechanical layers (free items; w line width, h text height)
Mechanical 15:
  lines w0.254: 81.153,45.593 81.153,105.156 ; 81.153,45.466 81.153,105.537 104.521,105.537 131.191,105.537 131.191,45.466 90.805,45.466 83.629,45.466 81.153,45.466

## Text inside footprints (layer, text, board x,y; h text height)
OLED1: Bottom Overlay "SSD1315 0.96in" at 129.54,81.28 h1 r90
U3: Bottom Overlay "*" at 97.638,80.353 h1.27 r90; Mechanical 13 "*" at 98.019,77.991 h1.27 r90